# Altium PCB 5M160ZE64.PcbDoc
Units mil, origin at the board's own origin, x right, y up, seen from the top; angles counter-clockwise.
Board outline 1246.69 x 1050 mil, 4 copper layers (Top Layer, Internal Plane 1, Signal Layer 1, Bottom Layer), stack 26.634 mil thick; 54 components, 79 nets, 255 pads, 130 vias.
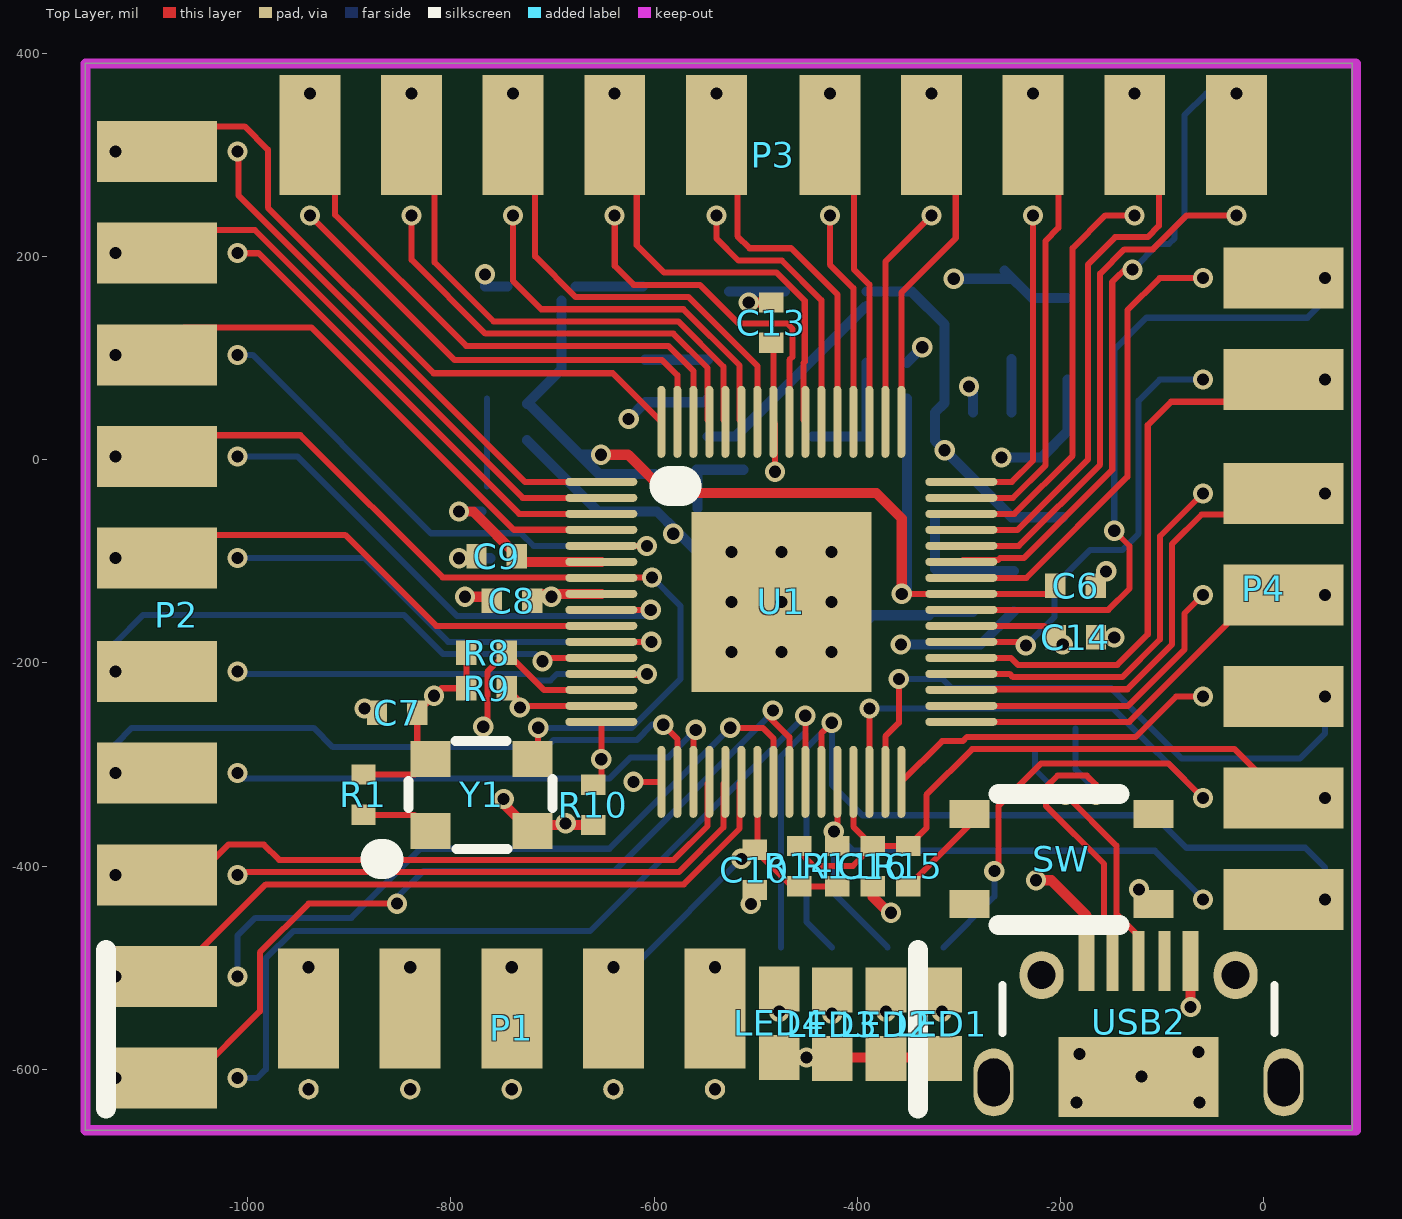
[diagram p0: Top Layer view]
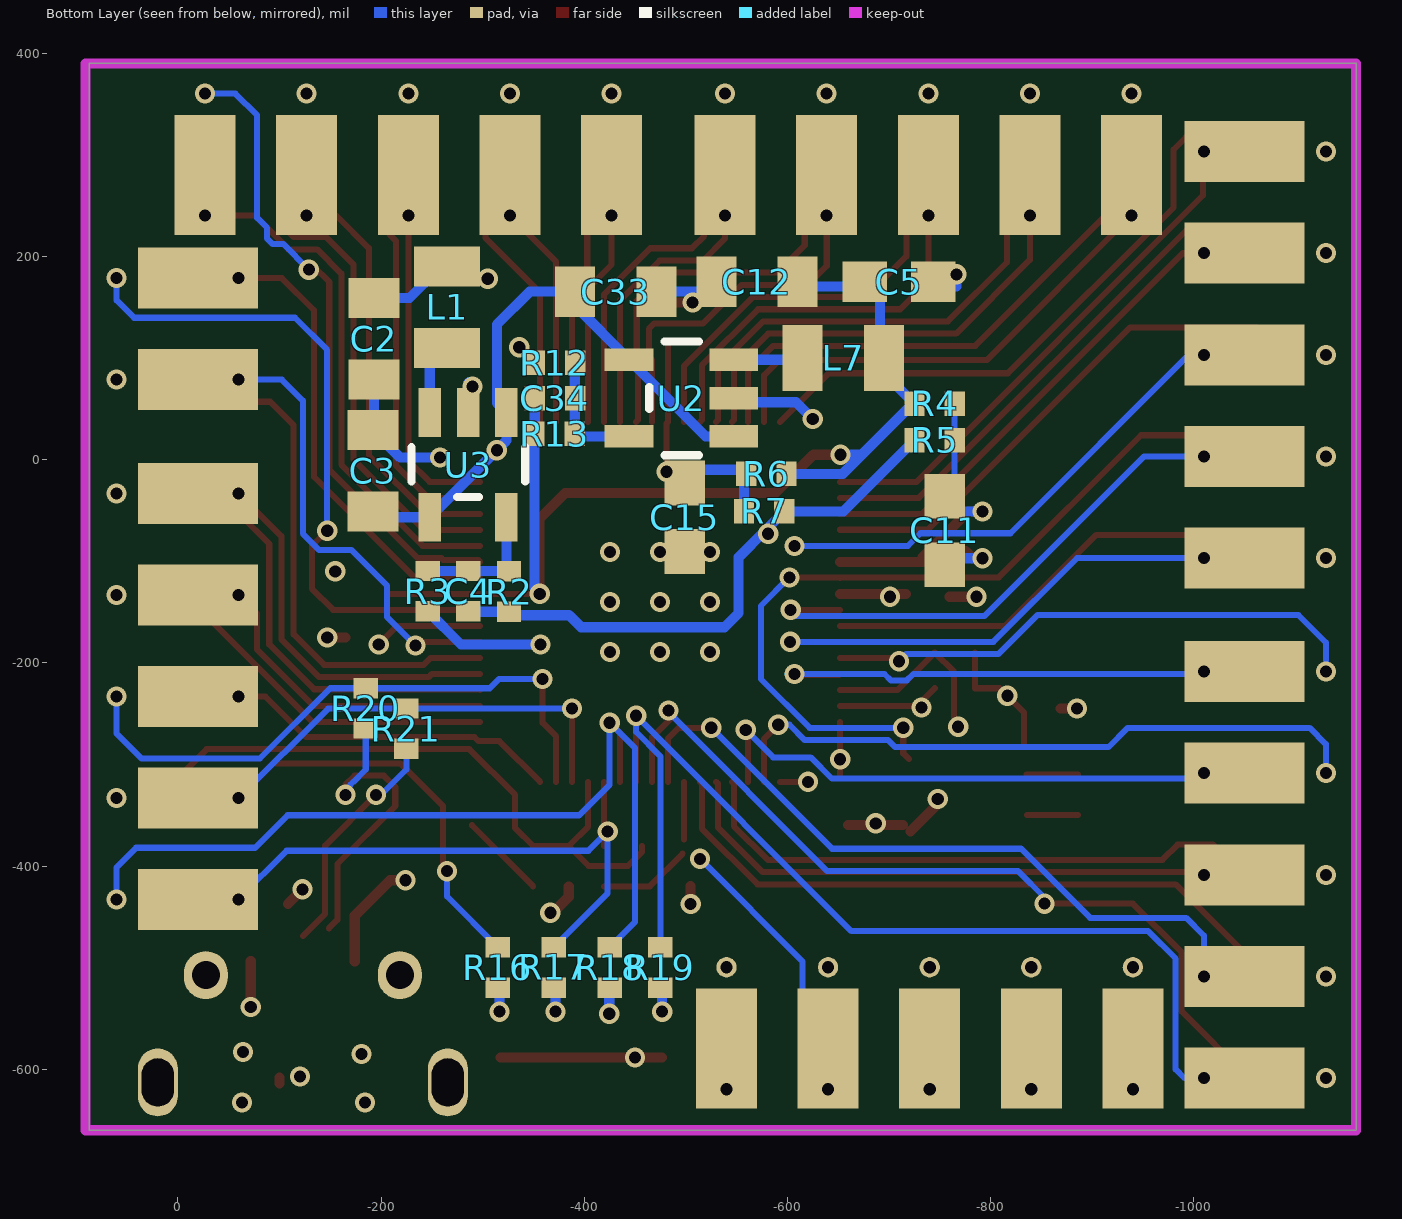
[diagram p1: Bottom Layer view, seen from below]
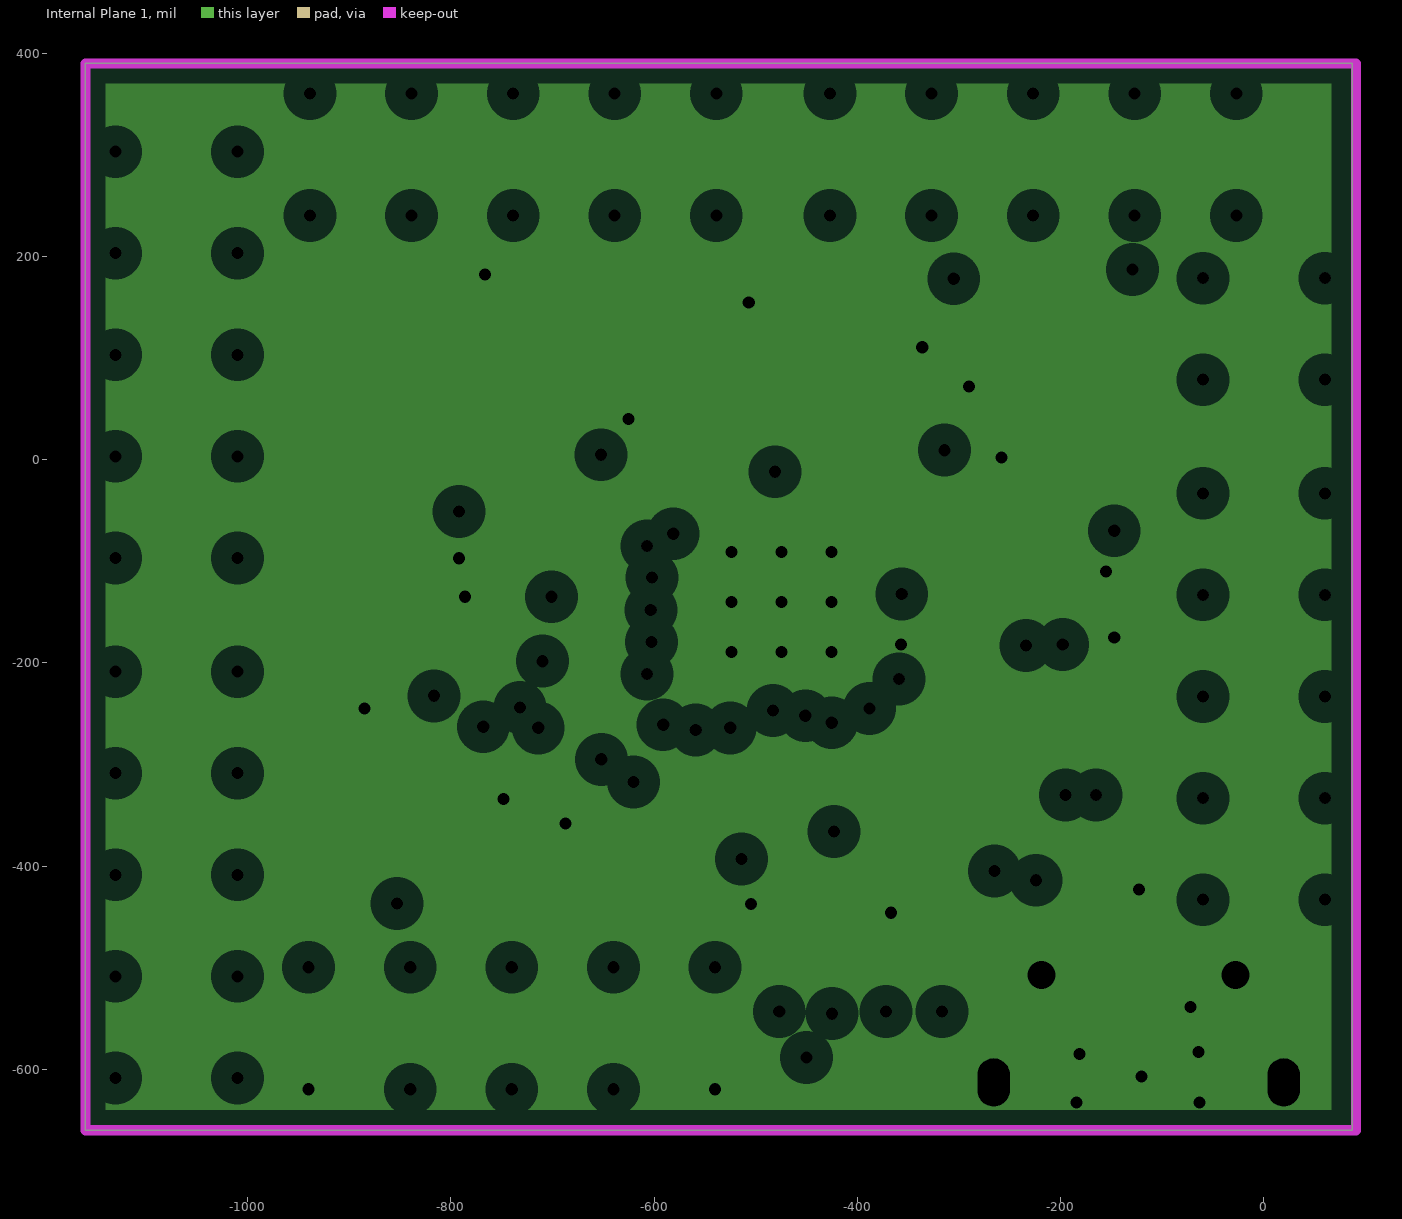
[diagram p2: Internal Plane 1, clearances drawn from the general rule]
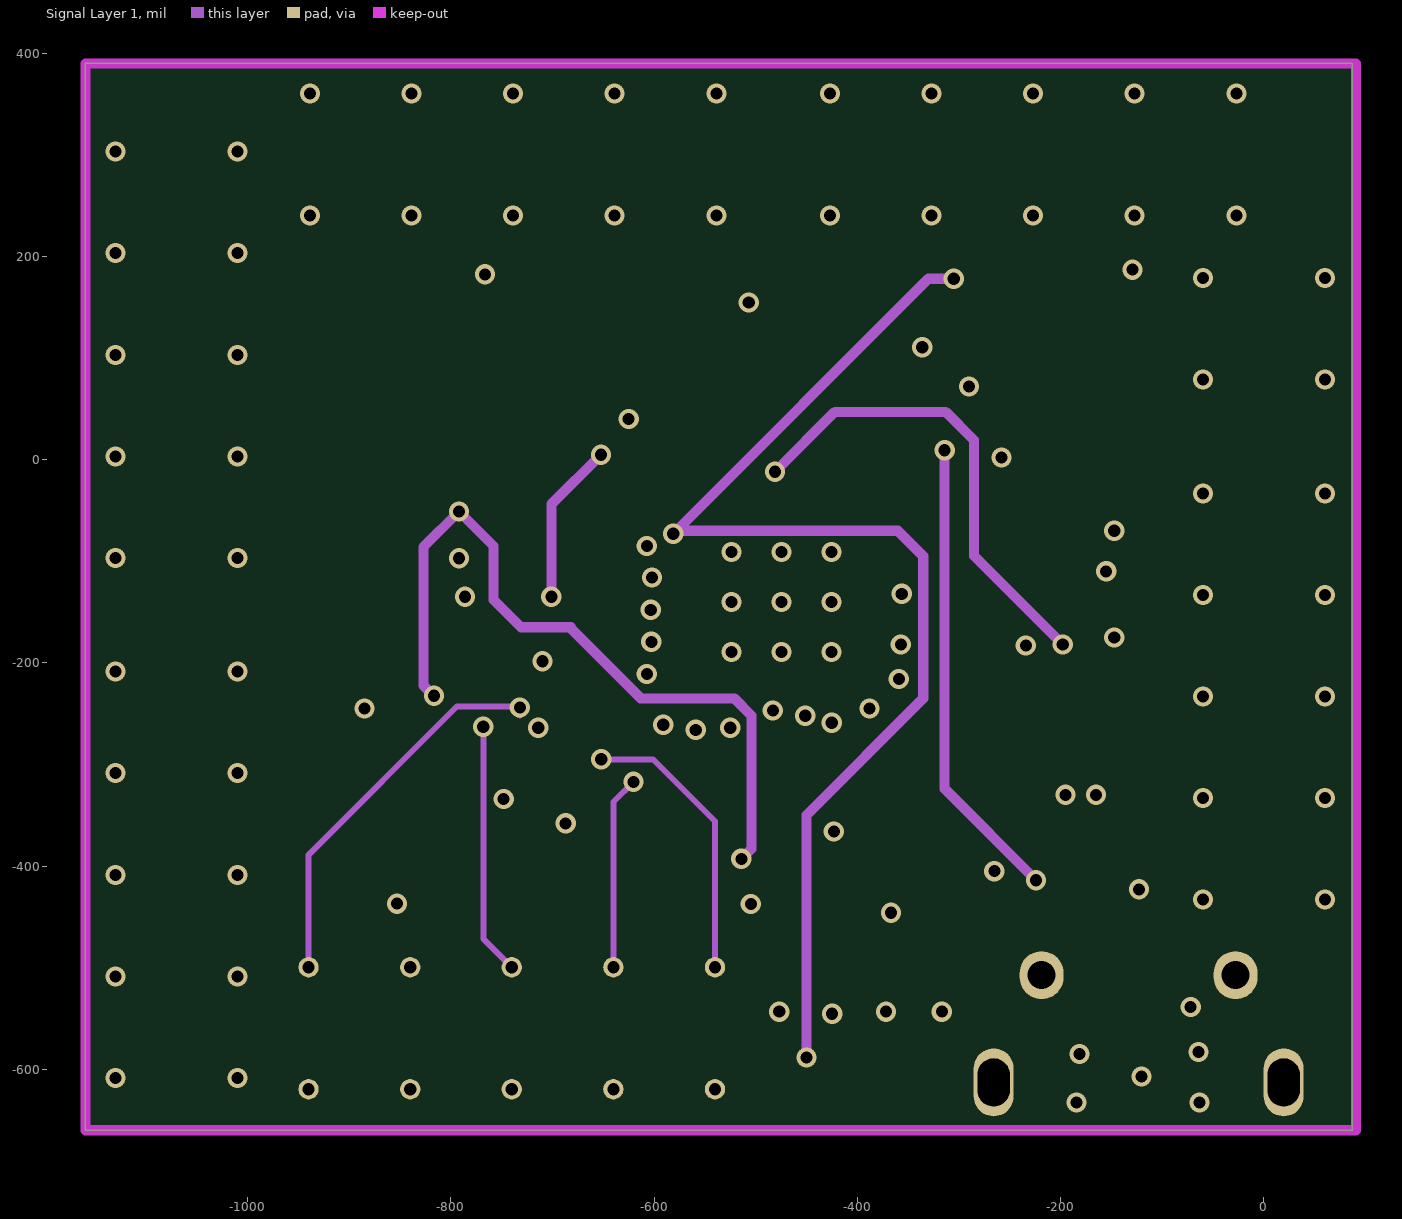
[diagram p3: Signal Layer 1]

## Layer stack, top to bottom
Top Solder: solder mask 0.4, Solder Resist, Dk 3.5
Top Layer: signal copper 1.4
Dielectric 1: core 6, FR-4, Dk 4.2
Internal Plane 1: plane copper 1.417, net GND
Dielectric 3: prepreg 5, Dk 4.2
Signal Layer 1: signal copper 1.417
Dielectric 2: core 10, Dk 4.2
Bottom Layer: signal copper 1.4
Bottom Solder: solder mask 0.4, Solder Resist, Dk 3.5

## Board outline
-1159.69,-660 87,-660 87,390 -1159.69,390

## Design rules (kind name [scope] priority, off if disabled: settings)
Clearance [All] p1: gap=6
DiffPairsRouting [All] p1: maxlimit=10 minlimit=10 mostfreqgap=10 toplayer_minwidth=6 toplayer_maxwidth=15 toplayer_prefwidth=15 midlayer1_minwidth=6 midlayer1_maxwidth=15 midlayer1_prefwidth=15 bottomlayer_minwidth=6 bottomlayer_maxwidth=15 bottomlayer_prefwidth=15 maxuncoupledlength=500
MinimumSolderMaskSliver [All] p1 off: minsoldermaskwidth=10
PlaneClearance [All] p1: clearance=20
PlaneConnect [All] p1: planeconnectstyle=Direct reliefexpansion=20 reliefentries=4 reliefconductorwidth=10 reliefairgap=10
PolygonConnect [All] p1: connectstyle=Direct reliefconductorwidth=10 reliefentries=4 polygonreliefangle="90 Angle" airgapwidth=10
RoomDefinition main [InComponentClass('main')] p1 off: confinementstyle=ConfineIn formatcopy=TRUE lockcomponents=FALSE outline 2650.31,580 5460.31,580 5460.31,2300 2650.31,2300
RoutingVias [All] p1: holewidth=12 width=20 viastyle="Through Hole" minholewidth=12 minwidth=20 maxholewidth=28 maxwidth=50
SilkToBoardRegionClearance [All] p1 off:
SilkToSilkClearance [All] p1 off: silktosilkclearance=10
SilkToSolderMaskClearance [IsPad] p1 off: minsilkscreentomaskgap=10 clearancetoexposedcopper=TRUE
SolderMaskExpansion [All] p1: expansion=4
UnpouredPolygon [All] p1: allowunpoured=FALSE
Width [All] p1: maxlimit=60 minlimit=6 preferedwidth=6
22 further rules are at their usual default settings.

## Components (designator, comment, footprint, x,y, rotation, side; value= is the part's Value field where it differs from the comment)
C2 "Cap" 0805 -193,119 r90 bottom
C3 "Cap" 0805 -192,-11 r270 bottom
C4 "22pF" 0402 -286,-129.68 r90 bottom
C5 "4.7uF" 0603 -710,175 r0 bottom
C6 "0.1uF" 0402 -185,-124 r180 top
C7 "0.1uF" 0402 -853,-249 r0 top
C8 "0.1uF" 0402 -740,-139 r0 top
C9 "0.1uF" 0402 -755,-95 r0 top
C10 "0.1uF" 0402 -501,-404 r90 top
C11 "4.7uF" 0603 -754.69,-70 r90 bottom
C12 "Cap" 0805 -570,175 r180 bottom
C13 "0.1uF" 0402 -484.69,135 r270 top
C14 "0.1uF" 0402 -184.69,-175 r180 top
C15 "4.7uF" 0603 -499,-57 r90 bottom
C16 "1uF" 0402 -384.69,-400 r270 top
C33 "Cap" 0805 -431,165.31 r0 bottom
C34 "22pF" 0402 -371,60.32 r180 bottom
L1 "2.2uH" 0806 -265,150 r90 bottom
L7 "2.2uH" 0806 -655,100 r180 bottom
LED1 "LED0" 0603 -316.69,-556 r90 top
LED2 "LED0" 0603 -371.69,-556 r90 top
LED3 "LED0" 0603 -424.69,-556 r90 top
LED4 "LED0" 0603 -476.69,-555 r90 top
P1 "USB_BLASTER_JTAG" USB_BLASTER_JTAG_SIDE -540,-499.69 r270 top
P2 "10P*2" "10P*2, SIDE" -1069.69,300 r0 top
P3 "10P*2" "10P*2, SIDE" -30,300 r270 top
P4 "7P*2" "7P*2, SIDE" 0,-430 r180 top
R1 "10k" 0402 -886,-330 r90 top
R2 "45k" 0402 -326,-129.68 r270 bottom
R3 "10k" 0402 -246,-129.68 r90 bottom
R4 "0R" 0402 -745,55 r0 bottom
R5 "0R" 0402 -745,19 r0 bottom
R6 "NC" 0402 -579,-14 r180 bottom
R7 "0R" 0402 -577,-51 r180 bottom
R8 "10k" 0402 -764.69,-190 r180 top
R9 "10k" 0402 -764.69,-225 r180 top
R10 "1k" 0402 -659.69,-340 r90 top
R11 "10k" 0402 -419.69,-400 r270 top
R12 "10k" 0402 -371,95.32 r180 bottom
R13 "45k" 0402 -371,25.32 r0 bottom
R14 "10k" 0402 -457,-400 r270 top
R15 "200R" 0402 -349.69,-400 r270 top
R16 "10k" 0402 -315,-500 r90 bottom
R17 "10k" 0402 -370,-500 r90 bottom
R18 "10k" 0402 -425,-500 r90 bottom
R19 "10k" 0402 -475,-500 r90 bottom
R20 "NC" 0402 -185,-245 r90 bottom
R21 "NC" 0402 -225,-265 r90 bottom
SW "SW-PB" SW3x4 -199,-393 r0 top
U1 "5M160ZE64" 5M160ZE64 -474.69,-140 r0 top
U2 "RT8059" SOT23-5 -496,60.32 r90 bottom
U3 "RT8059" SOT23-5 -286,-4.68 r0 bottom
USB2 "USB Micro Type B" MICRO-YZX -123,-724 r0 top
Y1 "OSC_50M" TXC_7Q -769.69,-330 r0 top

## Footprints (in the part's own frame and the unit in brackets; to place one, negate y for a bottom-side part, rotate by r counter-clockwise, add the part's x,y. Pads: shape width x height; smd on the part's side, far side on the other; paste and mask are expansions set on the pad)
5M160ZE64 [mm]
  rect 4.5x4.5 smd: 0(0,0)
  oval 1.8x0.2 smd: 1(-4.5,3) 2(-4.5,2.6) 3(-4.5,2.2) 4(-4.5,1.8) 5(-4.5,1.4) 6(-4.5,1) 7(-4.5,0.6) 8(-4.5,0.2) 9(-4.5,-0.2) 10(-4.5,-0.6) 11(-4.5,-1) 12(-4.5,-1.4) 13(-4.5,-1.8) 14(-4.5,-2.2) 15(-4.5,-2.6) 16(-4.5,-3) 33(4.5,-3) 34(4.5,-2.6) 35(4.5,-2.2) 36(4.5,-1.8) 37(4.5,-1.4) 38(4.5,-1) 39(4.5,-0.6) 40(4.5,-0.2) 41(4.5,0.2) 42(4.5,0.6) 43(4.5,1) 44(4.5,1.4) 45(4.5,1.8) 46(4.5,2.2) 47(4.5,2.6) 48(4.5,3)
  oval 0.2x1.8 smd: 17(-3,-4.5) 18(-2.6,-4.5) 19(-2.2,-4.5) 20(-1.8,-4.5) 21(-1.4,-4.5) 22(-1,-4.5) 23(-0.6,-4.5) 24(-0.2,-4.5) 25(0.2,-4.5) 26(0.6,-4.5) 27(1,-4.5) 28(1.4,-4.5) 29(1.8,-4.5) 30(2.2,-4.5) 31(2.6,-4.5) 32(3,-4.5) 49(3,4.5) 50(2.6,4.5) 51(2.2,4.5) 52(1.8,4.5) 53(1.4,4.5) 54(1,4.5) 55(0.6,4.5) 56(0.2,4.5) 57(-0.2,4.5) 58(-0.6,4.5) 59(-1,4.5) 60(-1.4,4.5) 61(-1.8,4.5) 62(-2.2,4.5) 63(-2.6,4.5) 64(-3,4.5)
  silkscreen extent -2.8,2.9 -2.5,2.9, body extent -3.5,-3.5 3.5,3.5, height 1
"7P*2, SIDE" [mm]
  rect 3x1.524 smd: 1(-0.5,0.08) 3(-0.5,-2.46) 5(-0.5,-5) 7(-0.5,-7.54) 9(-0.5,-10.08) 11(-0.5,-12.92) 13(-0.5,-15.46)
  rect 3x1.524 smd far side: 2(0.5,0.08) 4(0.5,-2.46) 6(0.5,-5) 8(0.5,-7.54) 10(0.5,-10.08) 12(0.5,-12.92) 14(0.5,-15.46)
"10P*2, SIDE" [mm]
  rect 3x1.524 smd: 1(-0.5,0.08) 3(-0.5,-2.46) 5(-0.5,-5) 7(-0.5,-7.54) 9(-0.5,-10.08) 11(-0.5,-12.92) 13(-0.5,-15.46) 15(-0.5,-18) 17(-0.5,-20.54) 19(-0.5,-23.08)
  rect 3x1.524 smd far side: 2(0.5,0.08) 4(0.5,-2.46) 6(0.5,-5) 8(0.5,-7.54) 10(0.5,-10.08) 12(0.5,-12.92) 14(0.5,-15.46) 16(0.5,-18) 18(0.5,-20.54) 20(0.5,-23.08)
0402 [mil] "0402-RES"
  rect 20x24 smd: 1(-19.68,0) 2(20,0)
0603 [mil] "0603-RES"
  rect 44x40 smd: 1(-33.46,0) 2(34,0)
0805 [mil]
  rect 39.37x50 smd: 1(-40,0) 2(40,0)
  body extent -50,-30 50,30, height 31
0806 [mm]
  rect 1x1.65 smd: 1(-1.016,0) 2(1.016,0)
  body extent -1,-0.8 1,0.8, height 0.5
MICRO-YZX [mm]
  rect 0.4x1.5 smd: 1(-1.3,5.85) 5(1.3,5.85)
  rect 0.3x1.5 smd: 2(-0.65,5.85) 3(0,5.85) 4(0.65,5.85)
  oval 1x1.7 hole 0.8 slot 1.2 at 90 deg: 5(-3.625,2.82) 5(3.625,2.82)
  oval 1.1x1.2 hole 0.7: 5(-2.425,5.5) 5(2.425,5.5)
  rect 4x2 smd: 5(0,2.95)
  silkscreen extent -3.4,4.05 3.4,5.25
SOT23-5 [mil] "SOT23-5"
  rect 22x48 smd: 1(-37.4,-51.19) 2(0,-51.19) 3(38,-51.19) 4(38,52) 5(-37.4,52)
  silkscreen extent -56,-17 56,32
SW3x4 [mm]
  rect 1x0.7 smd: 1(-2.3,1.125) 2(2.3,-1.125) 3(2.3,1.125) 4(-2.3,-1.125)
  silkscreen extent -1.58,-1.65 1.45,1.63
TXC_7Q [mm]
  rect 1x0.9 smd: 1(-1.275,-0.9) 2(1.275,-0.9) 3(1.275,0.9) 4(-1.275,0.9)
  silkscreen extent -2.52,-1.6 1.78,1.35
USB_BLASTER_JTAG_SIDE [mil]
  round 20 hole 12: 1(0,0) 2(120,0) 3(0,-100) 4(120,-100) 5(0,-200) 6(120,-200) 7(0,-300) 8(120,-300) 9(0,-400) 10(120,-400)
  rect 118.11x60 smd: 1(40.63,0) 3(40.63,-100) 5(40.63,-200) 7(40.63,-300) 9(40.63,-400)
  rect 118.11x60 smd far side: 2(80,0) 4(80,-100) 6(80,-200) 8(80,-300) 10(80,-400)
  silkscreen extent -17,-600 139,200

## Part data
C2 C3 C12 C33: "Capacitor"
C4 C5 C6 C7 C8 C9 C10 C11 C13 C14 C15 C16 C34: library part Cap, "Capacitor"
L1 L7: library part Inductor, "Inductor"
LED1 LED2 LED3 LED4: "Typical INFRARED GaAs LED"
R1 R2 R3 R4 R5 R6 R7 R8 R9 R10 R11 R12 R13 R14 R15 R16 R17 R18 R19 R20 R21: library part Res2, "Resistor"
SW: "Switch"
USB2: library part USB_Micro_TypeB, "Connector SMD USB Micro Type B middle mount"

## Via types
v1: diameter 19.68, hole 11.81, Top Layer to Bottom Layer, 68 vias
v2: diameter 20, hole 12, Top Layer to Bottom Layer, 62 vias

## Nets (pads, with @x,y where several pads share a name; then routed paths per layer and width w, separated by ;. In a path a pad name is that pad's centre, name@x,y a point inside that pad or via, vN(x,y) a via of type N, cw(c..) or ccw(c..) an arc to the next point about the centre after c; other vN are vias at no path point)
1.8: C5.2 C6.2 C8.2 C12.2 C34.1 L7.2 R4.2 R6.2 R13.2 U1.8 U1.41 | length 1323
  Top Layer w6: v2(-356.13,-132.13) U1.41 C6.2@-207.56,-132.13
  Top Layer w10: C8.2@-716.81,-132.13 v2@-706,-132.13 ; v2(-701,-135) -701,-137.13 v2@-706,-132.13 ; v2(-652.22,4.78) -625.49,4.78 -587.71,-33 -381,-33 -356.13,-57.87 v2(-356.13,-132.13) ; U1.8 v2@-706,-132.13
  Signal Layer 1 w10: v2(-701,-135) -701,-44 v2(-652.22,4.78)
  Bottom Layer w10: C5.2@-691,156.31 -691,100.31 -691,89 R4.2 -723.44,55 -673.22,4.78 ; C5.2@-677,170.31 C12.2@-611,170.31 ; v2(-652.22,4.78) -673.22,4.78 ; R6.2 -654.44,-14 -673.22,4.78 ; R13.2@-351.32,25.63 C34.1 ; v2@-351,-127 R13.2
3.3: C2.2 C4.1 L1.2 LED1.1 LED2.1 LED3.1 LED4.1 R2.2 R5.2 R7.2 | length 2016.9
  Top Layer w10: LED4.1 v2(-450,-588.46) LED1.1@-317.69,-588.46
  Signal Layer 1 w10: v2(-581,-73) v2@-577.94,-69.94 ; v2(-450,-588.46) -450,-350 -335,-235 -335,-95 -360.06,-69.94 v2@-577.94,-69.94 ; v2(-305,178) -330,178 v2@-577.94,-69.94
  Bottom Layer w10: R5.2 -655,-51 R7.2 v2@-578,-70 ; v2(-581,-73) v2@-578,-70 ; R2.2@-329.44,-153.13 -385.13,-153.13 -397,-165 -538,-165 -552,-151 -552,-96 v2@-578,-70 ; R2.2 -286.32,-149.68 C4.1 ; v2(-305,178) L1.2@-248,178 ; L1.2@-255,186 -228,159 C2.2
5V: C3.2 C33.2 U2.1 U2.4 U3.1 U3.4 USB2.1 | length 1144.6
  Top Layer w10: v2(-224,-414) -209,-414 -174.18,-448.82 USB2.1
  Signal Layer 1 w10: v2(-314,9.32) -314,-324 v2(-224,-414)
  Bottom Layer w10: U2.1 -519.4,22.91 U2.4 C33.2@-391,151.31 ; C33.2 -346.32,165.31 -314,133 -314,55.9 U3.1 -323.4,18.72 v2(-314,9.32) U3.4 C3.2@-197.69,-56.68
CLK0: P2.7 U1.7 Y1.3 | length 828.8
  Top Layer w6: P2.7@-1068.52,24 -948,24 -808,-116 -651.85,-116 U1.7 ; Y1.3 -714,-289.08 v2(-714,-264) ; U1.7@-651.47,-116 v2(-602,-116)
  Bottom Layer w6: v2(-714,-264) -622,-264 -574,-216 -574,-144 v2(-602,-116)
  other v1: -1130,3.15
GND: C2.1 C3.1 C5.1 C6.1 C7.1 C8.1 C9.1 C10.1 C11.1 C12.1 C13.1 C14.1 C15.1 C16.2 C33.1 P1.2 P1.10 R3.1 R10.1 R12.1 SW.2 U1.0 U2.2 U3.2 USB2.5 Y1.2 | length 840.4
  Top Layer w10: v2(-885,-245) C7.1@-868.69,-245 ; v2(-792,-97) -782.37,-97 C9.1@-775.37,-90 ; v2(-786,-135) C8.1@-759.37,-135 ; v2(-748,-334) -748,-339 Y1.2@-721,-366 ; Y1.2@-713.74,-359.68 R10.1 ; v2(-506.69,154.69) C13.1 ; v2(-504.69,-437.32) C10.1@-504.69,-419.68 ; C16.2 -384.69,-430.32 -369,-446 v2(-366.69,-446) ; C14.1 v2(-147,-175) ; v2(-122.74,-423) SW.2 ; USB2.5@-100,-613.86 USB2.5@-100,-608 ; v2(-71.82,-538.82) USB2.5@-71.82,-493.68
  Bottom Layer w10: v2(-792,-97) C11.1@-761.15,-97 ; v2(-766.32,182.31) -766.32,170.31 C5.1@-744.46,170.31 ; v2(-625,40) -608.48,56.52 -547.19,56.52 U2.2 ; C12.1@-526,165.31 C33.1 ; v2(-357,-182) -278.63,-182 R3.1 ; R12.1 v2(-336,110.63) ; v2(-290,72) -286,76 U3.2 ; v2(-258,2) -219,2 C3.1 -193,30 C2.1
  other v1: -184,-633 -63,-633 -120,-607 -181,-585 -64,-583 -523.9,-189.21 -474.69,-189.21 -425.47,-189.21 -523.9,-140 -474.69,-140 -425.47,-140 -523.9,-90.79 -474.69,-90.79 -425.47,-90.79
  other v2: -687,-358 -155,-110
NC1: P1.7
NC2: P1.8
NC3: P1.6
NetC4_2: C4.2 R2.1 R3.2 U3.5 | length 129.1
  Bottom Layer w10: U3.5 -323.4,-107.4 -321.12,-109.68 C4.2 R3.2
NetC13_2: C13.2 C14.2 C15.2 R6.1 R7.1 U1.39 U1.57 | length 786.9
  Top Layer w6: C13.2@-482.56,112.87 U1.57 -481,35.61 v2(-481,-12) ; U1.39 -216.06,-163.62 C14.2 v2(-197.69,-182)
  Signal Layer 1 w10: v2(-481,-12) -422,47 -313,47 -285,19 -285,-94.68 v2(-197.69,-182)
  Bottom Layer w10: R7.1@-557.32,-48 -557.32,-11 -558.32,-10 C15.2@-512,-10
NetC34_2: C34.2 R12.2 R13.1 U2.5 | length 124.2
  Bottom Layer w10: U2.5 -393.09,22.91 -391,25 C34.2 R12.2
NetL1_1: L1.1 U3.3 | length 52.5
  Bottom Layer w10: U3.3 L1.1@-248,99
NetL7_1: L7.1 U2.3 | length 61.8
  Bottom Layer w10: L7.1@-609,98.31 U2.3
NetLED1_2: LED1.2 R16.1 | length 45.6
  Top Layer w10: v2(-316.69,-543.32) LED1.2
  Bottom Layer w10: R16.1@-316.69,-521.37 v2(-316.69,-543.32) v2@-315,-541.63
NetLED2_2: LED2.2 R17.1 | length 43.3
  Top Layer w10: v2(-371.69,-543.32) LED2.2
  Bottom Layer w10: v2(-371.69,-543.32) R17.1@-371.69,-521.37
NetLED3_2: LED3.2 R18.1 | length 49.1
  Top Layer w10: v2(-424.69,-545.32) LED3.2
  Bottom Layer w10: v2@-425,-545 v2(-424.69,-545.32) R18.1@-424.69,-520
NetLED4_2: LED4.2 R19.1 | length 44.3
  Top Layer w10: v2(-476.69,-543.32) LED4.2
  Bottom Layer w10: v2(-476.69,-543.32) R19.1@-476.69,-521.37
NetR1_1: R1.1 Y1.1 | length 50.4
  Top Layer w6: R1.1 Y1.1@-835.63,-349.68
NetR15_2: R15.2 SW.1 | length 85
  Top Layer w6: R15.2 SW.1@-289.55,-359.87
NetR20_1: R20.1 USB2.2 | length 303.8
  Top Layer w6: v2(-165,-330) -165,-320 -174,-311 -202.87,-311 -214,-322.13 -214,-341 -157,-398 -157,-453 -148.59,-461.41
  Bottom Layer w6: R20.1 -185,-305 -172.5,-317.5 ; -170,-320 -165,-325 v2(-165,-330)
NetR21_1: R21.1 USB2.3 | length 236.5
  Top Layer w6: v2(-195,-330) -145,-380 -145,-446.93 USB2.3@-123,-468.93
  Bottom Layer w6: R21.1 -225,-305 -195,-335 v2(-195,-330)
PIN1: P2.2 U1.1 | length 517.5
  Top Layer w6: v1(-1010,303.15) -1009,302.15 -1009,260.03 -727.08,-21.89 U1.1
PIN2: P2.3 U1.2 | length 523.9
  Top Layer w6: P2.3@-1066.52,226 -993,226 -729.36,-37.64 U1.2
  other v1: -1130,203.15
PIN3: P2.4 U1.3 | length 464.4
  Top Layer w6: v1(-1010,203.15) -989.15,203.15 -732.61,-53.39 U1.3
PIN4: P2.5 U1.4 | length 493.2
  Top Layer w6: P2.5@-1062.52,130 -937,130 -738,-69 -651.85,-69 U1.4
  other v1: -1130,103.15
PIN5: P2.6 U1.5 | length 525.8
  Top Layer w6: U1.5 -607.12,-84.88 v2(-607,-85)
  Bottom Layer w6: v1(-1010,103.15) -995.15,103.15 -819.54,-72.46 -730.96,-72.46 -718.42,-85 v2(-607,-85)
PIN9: P2.8 U1.9 | length 523.2
  Top Layer w6: U1.9 v2(-603.13,-147.87)
  Bottom Layer w6: v1(-1010,3.15) -951.02,3.15 -793.87,-154 -609.25,-154 v2(-603.13,-147.87)
PIN10: P2.9 U1.10 | length 451.8
  Top Layer w6: P2.9@-1066.52,-74 -904,-74 -814.38,-163.62 U1.10
  other v1: -1130,-96.85
PIN11: P2.10 U1.11 | length 490.8
  Top Layer w6: U1.11 v2(-602.63,-179.37)
  Bottom Layer w6: v1(-1010,-96.85) -885.15,-96.85 -802.63,-179.37 v2(-602.63,-179.37)
PIN12: P2.11 U1.12 | length 544.5
  Top Layer w6: v2(-709.76,-198.37) -709.76,-198.24 -712.88,-195.12 U1.12
  Bottom Layer w6: v1(-1130,-208.66) -1130,-180 -1103,-153 -845.97,-153 -807.6,-191.37 -716.76,-191.37 v2(-709.76,-198.37)
PIN13: P2.12 U1.13 | length 458.7
  Top Layer w6: U1.13 -650.72,-212 -608,-212 v2(-607,-211)
  Bottom Layer w6: P2.12@-1007.66,-211 -724,-211 -717.63,-217.37 -701.89,-217.37 -695.52,-211 v2(-607,-211) v2@-600,-211
  other v1: -1010,-208.66
PIN18: P2.13 U1.18 | length 653.2
  Top Layer w6: v2(-591,-261) -577.05,-274.95 U1.18
  Bottom Layer w6: v1(-1130,-308.66) -1130,-280 -1114,-264 -935,-264 -916,-283 -706.13,-283 -699.13,-276 -617.03,-276 -602.03,-261 v2(-591,-261)
PIN19: P2.14 U1.19 | length 517.7
  Top Layer w6: U1.19 -561.3,-268.3 v2(-559,-266)
  Bottom Layer w6: P2.14@-1004.66,-314 -643.87,-314 -622.87,-293 -586,-293 v2(-559,-266)
  other v1: -1010,-308.66
PIN20: P2.15 U1.20 | length 577.9
  Top Layer w6: P2.15@-1048.66,-408.66 -1019,-379 -984,-379 -969,-394 -580.67,-394 -547.38,-360.71 -547.38,-318.99 U1.20
  other v1: -1130,-408.66
PIN21: P2.16 U1.21 | length 539.5
  Top Layer w6: v1@-1007.34,-406 -575.7,-406 -531.63,-361.93 -531.63,-318.99 U1.21
  other v1: -1010,-408.66
PIN22: P2.17 U1.22 | length 663.8
  Top Layer w6: P2.17@-1072.66,-508.66 -982,-418 -570.73,-418 -515.88,-363.15 -515.88,-318.99 U1.22
  other v1: -1130,-508.66
PIN23: P2.18 U1.24 | length 699.3
  Top Layer w6: v2(-525,-264) -493,-264 -482.56,-274.44 U1.24
  Bottom Layer w6: v1(-1010,-508.66) -1010,-468.66 -992.34,-451 -898,-451 -830,-383 -644,-383 v2(-525,-264)
PIN25: P2.19 U1.25 | length 840.1
  Top Layer w6: P2.19@-1053.66,-608.66 -988,-543 -988,-485 -940,-437 v2(-853,-437) ; v2(-483,-247) -488,-252 -466.81,-273.19 U1.25
  Bottom Layer w6: v2(-853,-437) -853,-431 -827,-405 -639.13,-405 -483,-248.87 v2(-483,-247)
  other v1: -1130,-608.66
PIN26: P2.20 R19.2 U1.26 | length 1073.4
  Top Layer w6: U1.26 v2(-451.06,-252.06)
  Bottom Layer w6: v1(-1010,-608.66) -990.66,-608.66 -982,-600 -982,-542.5 -981.94,-542.44 -981.94,-491 -954.94,-464 -663,-464 v2(-451.06,-252.06) -451.06,-268.09 -475,-292.03 R19.2
PIN27: P4.1 R18.2 U1.27 | length 916
  Top Layer w6: U1.27 -435.31,-269.31 v2(-425,-259)
  Bottom Layer w6: R18.2 -450,-455 -450,-284 v2(-425,-259) -425,-320 -395,-350 -108,-350 -76,-382 41,-382 60.31,-401.31 v1(60.31,-433.15)
PIN28: P4.2 R11.1 R17.2 U1.28 | length 607.2
  Top Layer w6: v2(-423,-366) -420,-366 -419.69,-366.32 R11.1 ; R11.1@-419.57,-380.2 U1.28
  Bottom Layer w6: R17.2 -423,-427 v2(-423,-366) -404,-385 -107,-385 P4.2@-59.69,-432.31
  other v1: -59.69,-433.15
PIN29: C16.1 P4.3 R14.1 R15.1 U1.29 | length 616
  Top Layer w6: R14.1 -457,-386 -443,-400 -404.37,-400 C16.1 ; U1.29 -403.82,-361.18 C16.1 ; P4.3@-1.46,-312 -28.46,-285 -287,-285 -332,-330 -332,-362.63 R15.1 C16.1
  other v1: 60.31,-333.15
PIN30: P4.4 R16.2 R21.2 U1.30 | length 837.1
  Top Layer w6: U1.30 -388.07,-242.07 -388,-242.14 v2(-388,-245) ; v2(-265,-405) -260.87,-400.87 -260.87,-340.87 -219,-299 -93.83,-299 v1(-59.69,-333.15)
  Bottom Layer w6: v2(-388,-245) -147.83,-245 v1(-59.69,-333.15) ; R16.2 -265,-430 v2(-265,-405)
PIN31: P4.5 R20.2 U1.31 | length 605
  Top Layer w6: U1.31 -372.32,-272.32 -359,-259 v2(-359,-216)
  Bottom Layer w6: v2(-359,-216) -316,-216 -307,-225 R20.2 -150,-225 -80.85,-294.15 35.85,-294.15 60.31,-269.69 v1(60.31,-233.15)
PIN32: P4.6 U1.32 | length 331.7
  Top Layer w6: U1.32 -316.41,-277 -295.97,-277 -291.97,-273 -126,-273 -86.15,-233.15 v1(-59.69,-233.15)
PIN33: P4.7 U1.33 | length 342
  Top Layer w6: U1.33 -132.23,-258.11 P4.7@-7.27,-133.15
  other v1: 60.31,-133.15
PIN34: P4.8 U1.34 | length 303.8
  Top Layer w6: U1.34 -133.45,-242.36 -78,-186.91 -78,-151.46 v1(-59.69,-133.15)
PIN35: P4.9 U1.35 | length 425.8
  Top Layer w6: U1.35 -296.91,-226 -134.06,-226 -90,-181.94 -90,-83 -61,-54 P4.9@-1.17,-54
  other v1: 60.31,-33.15
PIN36: P4.10 U1.36 | length 373.5
  Top Layer w6: U1.36 -249.97,-210.87 -246.84,-214 -139.03,-214 -102,-176.97 -102,-75.46 v1(-59.69,-33.15)
PIN37: P4.11 U1.37 | length 526.3
  Top Layer w6: U1.37 -248.75,-195.12 -241.87,-202 -144,-202 -114,-172 -114,34 -91,57 P4.11@-1.98,57
  other v1: 60.31,78.66
PIN38: P4.12 U1.38 | length 444.5
  Top Layer w6: U1.38 -234.37,-179.37 -234.37,-182.63 v2(-234,-183)
  Bottom Layer w6: v2(-234,-183) -206,-155 -206,-124 -171,-89 -139.13,-89 -123,-72.87 -123,58 -102.34,78.66 v1(-59.69,78.66)
PIN40: P4.13 U1.40 | length 664.7
  Top Layer w6: U1.40 -152.87,-147.87 -132,-127 -132,-85 v2(-147,-70)
  Bottom Layer w6: v2(-147,-70) -147,108 -115.34,139.66 43.1,139.66 60.31,156.88 v1(60.31,178.66)
PIN42: P4.14 U1.42 | length 456.1
  Top Layer w6: U1.42 -233.38,-116.38 -134,-17 -134,147 -102.34,178.66 v1(-59.69,178.66)
PIN43: P3.1 U1.43 | length 638.6
  Top Layer w6: U1.43 -295.69,-98.8 -261.24,-98.8 -259.32,-96.88 -235.94,-96.88 -149,-9.94 -149,175 -133,191 v2(-129,187)
  Bottom Layer w6: v2(-129,187) -103.74,212.26 -93.12,212.26 -87.85,217.53 -87.85,228.15 -78,238 -78,339 -56.69,360.31 v1(-26.85,360.31)
PIN44: P3.2 U1.44 | length 515.5
  Top Layer w6: U1.44 -240.91,-84.88 -161,-4.97 -161,183 -137,207 -109.03,207 -75.71,240.31 v1(-26.85,240.31)
PIN45: P3.3 U1.45 | length 496.7
  Top Layer w6: U1.45 -242.13,-69.13 -173,0 -173,192 -146,219 -114,219 -103,230 P3.3@-103,295.83
  other v1: -126.85,360.31
PIN46: P3.4 U1.46 | length 411.8
  Top Layer w6: U1.46 -245.39,-53.39 -188,4 -188,208 -155.69,240.31 v1(-126.85,240.31)
PIN47: P3.5 U1.47 | length 401.8
  Top Layer w6: U1.47 -246.67,-37.64 -214.85,-5.82 -214.85,215.15 -202,228 P3.5@-202,294.83
  other v1: -226.85,360.31
PIN48: P3.6 U1.48 | length 320.5
  Top Layer w6: U1.48 -247.89,-21.89 -226.85,-0.85 v1(-226.85,240.31)
PIN49: P3.7 U1.49 | length 280.9
  Top Layer w6: U1.49 -356.57,164.43 -303,218 P3.7@-303,295.83
  other v1: -326.85,360.31
PIN50: P3.8 U1.50 | length 222
  Top Layer w6: U1.50 -372.32,194.84 v1(-326.85,240.31)
PIN51: P3.9 U1.51 | length 264.9
  Top Layer w6: P3.9@-403,295.83 -403,187 -388.07,172.07 U1.51
  other v1: -426.85,360.31
PIN52: P3.10 U1.52 | length 212.7
  Top Layer w6: v1(-426.85,240.31) -426.85,191.85 -403.82,168.82 U1.52
PIN53: P3.11 U1.53 | length 326.6
  Top Layer w6: P3.11@-518,299.02 -518,220 -506,208 -465,208 -419.57,162.57 U1.53
  other v1: -538.66,360.31
PIN54: P3.12 U1.54 | length 271
  Top Layer w6: v1(-538.66,240.31) -538.66,217.66 -517,196 -474.3,196 -435.31,157.01 U1.54
PIN55: P3.13 U1.55 | length 395.5
  Top Layer w6: P3.13@-617,298.02 -617,211 -590,184 -479.27,184 -451.69,156.41 -451.69,96.3 -452.89,95.1 -452.89,38.99 U1.55
  other v1: -638.66,360.31
PIN56: P3.14 U1.56 | length 343.1
  Top Layer w6: v1(-638.66,240.31) -638.66,190.66 -620,172 -555,172 -517,134 -468.96,134 -463.69,128.73 -463.69,101.27 -466.81,98.15 U1.56
PIN58: P3.15 U1.58 | length 416.5
  Top Layer w6: P3.15@-717,298.02 -717,200 -677,160 -566,160 -498.31,92.31 U1.58
  other v1: -738.66,360.31
PIN59: P3.16 U1.59 | length 378.1
  Top Layer w6: v1(-738.66,240.31) -738.66,175.66 -711,148 -571.09,148 -515.88,92.79 -515.88,38.99 U1.59
PIN60: P3.17 U1.60 | length 485
  Top Layer w6: P3.17@-816,297.02 -816,194 -758,136 -576.06,136 -531.63,91.57 -531.63,38.99 U1.60
  other v1: -838.66,360.31
PIN61: P3.18 U1.61 | length 432.9
  Top Layer w6: v1(-838.66,240.31) -838.66,196.66 -766,124 -581.03,124 -547.38,90.35 -547.38,38.99 U1.61
PIN62: P3.19 U1.62 | length 520.5
  Top Layer w6: P3.19@-914,295.02 -914,241 -785,112 -586,112 -561.3,87.3 U1.62
  other v1: -938.66,360.31
PIN63: P3.20 U1.63 | length 472.6
  Top Layer w6: v1(-938.66,240.31) -796.35,98 -592,98 -577.05,83.05 U1.63
PIN64: P2.1 U1.64 | length 625.6
  Top Layer w6: P2.1@-1064.52,328 -1003,328 -980,305 -980,248 -817,85 -640.63,85 U1.64
  other v1: -1130,303.15
TCK: P1.1 R10.2 U1.16 | length 334.9
  Top Layer w6: R10.2@-651.85,-312.17 v2(-651.85,-295) U1.16
  Signal Layer 1 w6: v2(-651.85,-295) -601,-295 -540,-356 P1.1@-540,-499.69
TDI: P1.9 R9.1 U1.15 | length 502.4
  Top Layer w6: R9.1 v2@-727.64,-242.36 ; v2(-732,-244) -728.36,-247.64 -727.64,-247.64 v2@-727.64,-242.36 ; U1.15 v2@-727.64,-242.36
  Signal Layer 1 w6: P1.9@-940,-499.69 -940,-389 -794,-243 -741,-243 -732,-252 v2(-732,-244)
TDO: P1.3 U1.17 | length 218.1
  Top Layer w6: v2(-620.17,-317.17) U1.17
  Signal Layer 1 w6: P1.3@-640,-499.69 -640,-337 v2(-620.17,-317.17)
TMS: P1.5 R8.1 U1.14 | length 439.1
  Top Layer w6: v2(-768,-263) -764,-259 -764,-209 R8.1 -708.39,-226.61 U1.14
  Signal Layer 1 w6: v2(-768,-263) -768,-471.69 P1.5@-740,-499.69
VCCIO1: C7.2 C9.2 C10.2 C11.2 P1.4 R1.2 R4.1 R5.1 R8.2 R9.2 R11.2 R14.2 U1.6 U1.23 Y1.4 | length 1578
  Top Layer w6: R1.2 Y1.4@-835.32,-310 ; Y1.4@-833,-281.45 C7.2 v2(-816.5,-232.5) -809,-225 R9.2 R8.2 ; -498.31,-373.62 U1.23 ; C10.2@-496.84,-387.84 -464.69,-420 R11.2
  Top Layer w10: v2(-792,-51) -778,-51 C9.2@-733,-96 ; C9.2@-733,-100.63 U1.6
  Signal Layer 1 w10: v2(-816.5,-232.5) -827,-222 -827,-86 v2(-792,-51) -758,-85 -758,-138 -731,-165 -682,-165 -682,-166 -613,-235 -521,-235 -504,-252 -504,-383 v2(-514,-393)
  Bottom Layer w6: C11.2@-764.37,-26.32 R4.1@-764.37,60 ; P1.4@-640,-579.69 -615,-554.69 -615,-494 v2(-514,-393)
  Bottom Layer w10: v2(-792,-51) C11.2@-769.69,-51
pads on no net: SW.3 SW.4 USB2.4

## Polygon pours and split planes (outlines as drawn)
GND on Internal Plane 1 (split plane): 66.9,-639.9 -1139.59,-639.9 -1139.59,369.9 66.9,369.9

## Keep-outs
Keep-Out Layer:
  lines w10: -1159.69,-660 91,-660 91,390 -1159.69,390 -1159.69,-660